# Altium PCB 智能家居-网关.PcbDoc
Units mm, origin at the board's own origin, x right, y up, seen from the top; angles counter-clockwise.
Board outline 69.01 x 59.12 mm, 2 copper layers (Top Layer, Bottom Layer); 32 components, 32 nets, 146 pads, 0 vias.
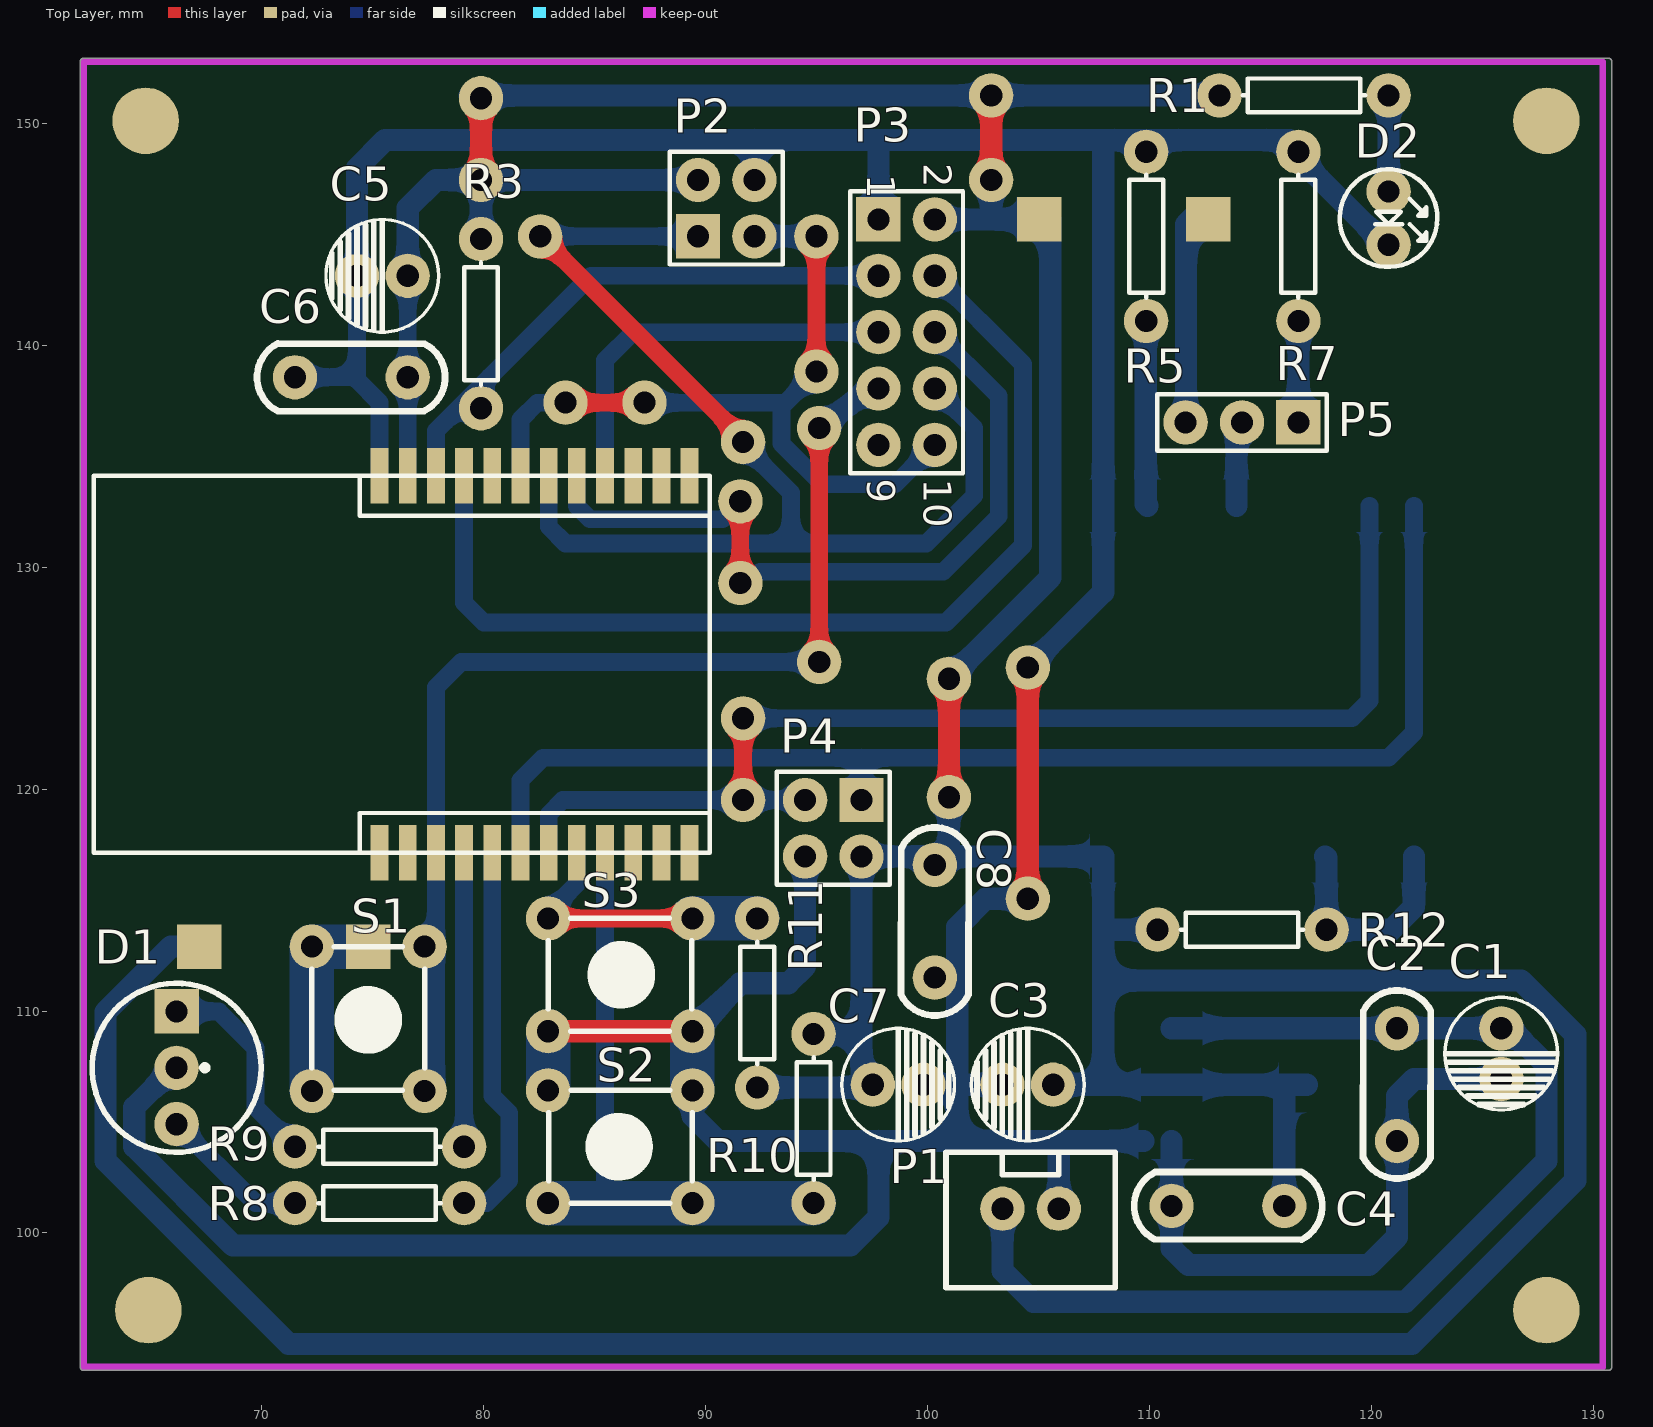
[diagram p0: Top Layer view]
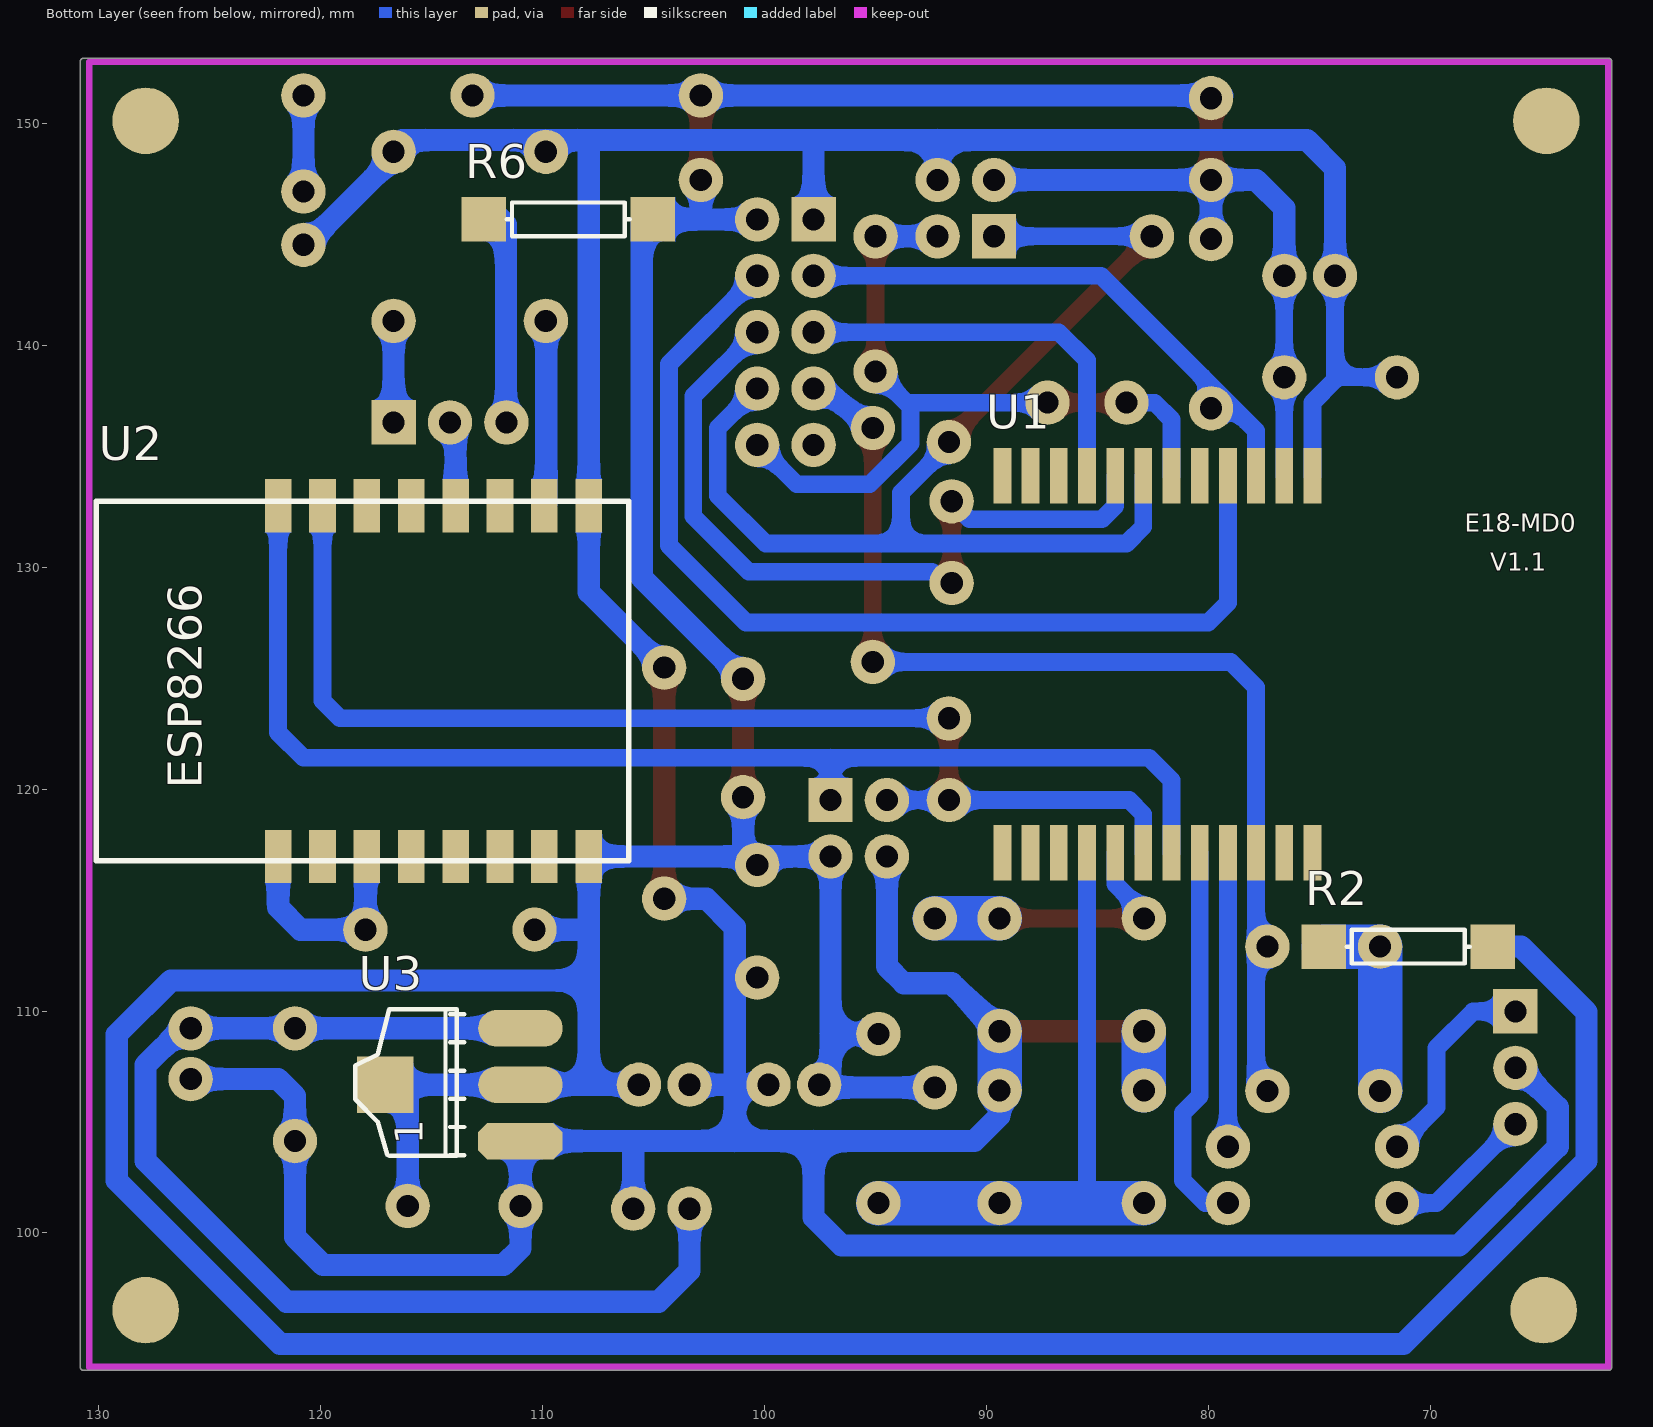
[diagram p1: Bottom Layer view, seen from below]

## Layer stack, top to bottom
Top Solder: solder mask 0.0102, Solder Resist, Dk 3.5
Top Layer: signal copper 0.0356
Dielectric 1: dielectric 0.32, FR-4, Dk 4.8
Bottom Layer: signal copper 0.0356
Bottom Solder: solder mask 0.0102, Solder Resist, Dk 3.5

## Board outline
61.976,93.807 cw(c61.976,93.957) 61.826,93.957 61.826,152.781 cw(c61.976,152.781) 61.976,152.931 130.683,152.931 cw(c130.683,152.781) 130.833,152.781 130.833,93.957 cw(c130.683,93.957) 130.683,93.807

## Design rules (kind name [scope] priority, off if disabled: settings)
Clearance [All] p1: gap=0.3
PolygonConnect [All] p1: connectstyle=Relief reliefconductorwidth=0.254 reliefentries=4 polygonreliefangle="90 Angle" airgapwidth=0.254
RoutingVias [All] p1: holewidth=1 width=2 viastyle="Through Hole" minholewidth=0.711 minwidth=1.27 maxholewidth=0.711 maxwidth=1.27
SolderMaskExpansion [All] p1: expansion=0.102
Width [All] p1: maxlimit=3 minlimit=0.5 preferedwidth=0.5 minimp=50.000000 maximp=50.000000 favimp=50.000000
30 further rules are at their usual default settings.

## Components (designator, comment, footprint, x,y, rotation, side; value= is the part's Value field where it differs from the comment)
C1 "Cap Pol1" CD5 125.857,109.22 r0 top
C2 "0.01uF" 0.1UF 121.158,106.68 r90 top
C3 "Cap Pol1" CD5 105.664,106.68 r270 top
C4 "0.01uF" 0.1UF 113.538,101.219 r0 top
C5 "Cap Pol1" CD5 76.581,143.129 r270 top
C6 "103" 0.1UF 74.041,138.557 r180 top
C7 "Cap Pol1" CD5 97.536,106.68 r90 top
C8 "103" 0.1UF 100.33,114.046 r270 top
D1 "RG-LED-K" RG-LED 66.167,109.982 r270 top
D2 "LED0" LED-3 120.777,146.926 r270 top
P1 "主控板电源接口" DG1282 108.458,110.236 r180 top
P2 "调试接口" HDR2X2 89.662,144.907 r0 top
P3 "程序下载接口" HDR2X5 97.79,145.669 r270 top
P4 "程序下载接口" HDR2X2 97.028,119.507 r180 top
P5 "ESP8266启动模式选择" HDR1X3 116.713,136.525 r180 top
R1 "Res1" AXIAL-0.3#1 116.967,151.257 r0 top
R2 "4.7K" AXIAL-0.3#2 70.993,112.903 r0 bottom
R3 "4.7K" AXIAL-0.3#1 79.883,140.97 r270 top
R5 "4.7K" AXIAL-0.3#1 109.855,144.907 r90 top
R6 "4.7K" AXIAL-0.3#2 108.839,145.669 r180 bottom
R7 "4.7K" AXIAL-0.3#1 116.713,144.907 r270 top
R8 "100" AXIAL-0.3#1 75.311,101.346 r0 top
R9 "100" AXIAL-0.3#1 75.311,103.886 r0 top
R10 "4.7K" AXIAL-0.3#1 94.869,105.156 r270 top
R11 "4.7K" AXIAL-0.3#1 92.329,110.363 r90 top
R12 "4.7K" AXIAL-0.3#1 114.173,113.665 r180 top
S1 "SW-PB" KEY_M 77.343,112.903 r270 top
S2 "SW-PB" KEY_M 89.408,101.346 r180 top
S3 "SW-PB" KEY_M 82.908,114.173 r0 top
U1 "Zigbee" E18-MD0-1 89.281,133.223 r180 bottom
U2 "ESP8266-12F" "ESP8266 - 12S" 121.919,116.967 r90 bottom
U3 "AMS1117-3.3" AMS1117 111,104.139 r90 bottom

## Footprints (in the part's own frame and the unit in brackets; to place one, negate y for a bottom-side part, rotate by r counter-clockwise, add the part's x,y. Pads: shape width x height; smd on the part's side, far side on the other; paste and mask are expansions set on the pad)
0.1UF [mm]
  round 2 hole 1: 1(-2.54,0) 2(2.54,0)
  silkscreen extent -4.22,-1.52 4.25,1.53
AMS1117 [mil]
  oct 65x150 smd: 1(0.03,-0.06)
  oval 65x150 smd: 2(100.03,-0.06) 3(200.03,-0.06)
  rect 100x100 smd: 4(100.03,239.94)
  silkscreen extent -26,100 234,293
AXIAL-0.3#1 [mm] "Axial Device, Thru-Hole; 2 Leads; 0.3 in Pin Spacing"
  round 2 hole 1: 1(-3.81,0) 2(3.81,0)
  silkscreen extent -2.77,-0.76 2.77,0.76
AXIAL-0.3#2 [mm] "Axial Device, Thru-Hole; 2 Leads; 0.3 in Pin Spacing"
  rect 2x2 all layers, no hole: 1(-3.81,0) 2(3.81,0)
  silkscreen extent -2.77,-0.76 2.77,0.76
CD5 [mm]
  round 2 hole 1: 1(0,0) 2(0,-2.286)
  silkscreen extent -2.54,-3.68 2.54,1.39
DG1282 [mm]
  round 2 hole 1: 1(2.54,9.144) 2(5.08,9.144)
  silkscreen extent 0,6.6 7.62,12.7
E18-MD0-1 [mm] "Connector; Header; 8 Position"
  rect 0.8x2.5 all layers, no hole: 1(13.97,0.9) 2(12.7,0.9) 3(11.43,0.9) 4(10.16,0.9) 5(8.89,0.9) 6(7.62,0.9) 7(6.35,0.9) 8(5.08,0.9) 9(3.81,0.9) 10(2.54,0.9) 11(1.27,0.9) 12(0,0.9) 13(0,-16.1) 14(1.27,-16.1) 15(2.54,-16.1) 16(3.81,-16.1) 17(5.08,-16.1) 18(6.35,-16.1) 19(7.62,-16.1) 20(8.89,-16.1) 21(10.16,-16.1) 22(11.43,-16.1) 23(12.7,-16.1) 24(13.97,-16.1)
  Top Layer lines w0.22: 0.14,-15.52 cw(c0.116,-15.496) 0.116,-15.53 0.11,-15.53
"ESP8266 - 12S" [mm]
  rect 2.4x1.2 smd: 1(0,0) 2(0,-2) 3(0,-4) 4(0,-6) 5(0,-8) 6(0,-10) 7(0,-12) 8(0,-14) 9(15.8,-14) 10(15.8,-12) 11(15.8,-10) 12(15.8,-8) 13(15.8,-6) 14(15.8,-4) 15(15.8,-2) 16(15.8,0)
  silkscreen extent -0.2,-15.8 16,8.2
HDR1X3 [mm] "Connector; Header; 3 Position"
  rect 2x2 hole 1: 1(0,0)
  round 2 hole 1: 2(2.54,0) 3(5.08,0)
  silkscreen extent -1.27,-1.27 6.35,1.27
HDR2X2 [mm]
  rect 2x2 hole 1: 1(0,0)
  round 2 hole 1: 2(0,2.54) 3(2.54,0) 4(2.54,2.54)
  silkscreen extent -1.27,-1.27 3.81,3.81
HDR2X5 [mm] "Connector; Header; 5x2 Position"
  rect 2x2 hole 1: 1(0,0)
  round 2 hole 1: 2(0,2.54) 3(2.54,0) 4(2.54,2.54) 5(5.08,0) 6(5.08,2.54) 7(7.62,0) 8(7.62,2.54) 9(10.16,0) 10(10.16,2.54)
  silkscreen extent -1.27,-1.27 11.43,3.81
KEY_M [mm]
  round 2 hole 1: 1(0,0) 1(6.5,0) 2(0,-5.08) 2(6.5,-5.08)
  silkscreen extent 0,-5.08 6.48,0
LED-3 [mm]
  round 2 hole 1: 1(0,0) 2(2.4,0)
  silkscreen extent -1,-2.2 3.4,2.2
RG-LED [mm]
  rect 2x2 hole 1: 1(0,0)
  round 2 hole 1: 2(2.54,0) 3(5.08,0)
  silkscreen extent -1.27,-3.81 6.35,3.81

## Part data
C1 C3 C5 C7: "Polarized Capacitor (Radial)"
C2 C4 C6 C8: library part C
D2: "Typical INFRARED GaAs LED"
P1: library part "Header 2H", "Header, 2-Pin, Right Angle"
P2 P4: library part "Header 2X2H", "Header, 2-Pin, Dual row, Right Angle"
P3: library part "Header 5X2", "Header, 5-Pin, Dual row"
P5: library part "Header 3", "Header, 3-Pin"
R1: "Resistor"
R2 R3 R5 R6 R7 R8 R9 R10 R11 R12: library part R
S1 S2 S3: "Switch"
U1: library part E18-MDO, "Zigbee模块"
U2: library part ESP8266_12S
U3: library part AMS1117

## Free pads (board coordinates)
  round 2 hole 1: 2(79.883,147.447) 2(79.883,151.13) 2(91.694,119.507) 2(100.965,119.634) 2(100.965,124.968) 2(102.87,147.447) 2(102.87,151.257) 3(91.694,123.19) 4(82.55,144.907) 4(83.693,137.414) 4(87.249,137.414) 4(91.567,129.286) 4(91.567,132.969) 4(91.694,135.636) 4(94.996,138.811) 4(94.996,144.907) 4(95.123,125.73) 4(95.123,136.271) 6(104.521,115.062) 7(104.521,125.476)
  round 3 all layers, no hole: 8(64.77,150.114) 8(64.897,96.52) 8(127.889,150.114) 9(127.889,96.52)

## Nets (pads, with @x,y where several pads share a name; then routed paths per layer and width w, separated by ;. In a path a pad name is that pad's centre, name@x,y a point inside that pad or via, vN(x,y) a via of type N, cw(c..) or ccw(c..) an arc to the next point about the centre after c; other vN are vias at no path point)
BOOT: P5.2 U2.12 | length 3.9
  Bottom Layer w1: U2.12 113.919,136.271 P5.2
DBG_CSN: P3.5 U1.9 | length 18
  Bottom Layer w0.8: U1.9 85.471,139.319 86.741,140.589 P3.5
DBG_DC: P3.3 R3.2 U1.3 | length 24.9
  Bottom Layer w0.8: U1.3 77.851,136.144 84.836,143.129 P3.3
DBG_DIO: P3.4 U1.4 | length 46.5
  Bottom Layer w0.8: U1.4 79.121,128.397 80.01,127.508 100.838,127.508 104.308,130.978 104.308,139.151 P3.4
DBG_MISO: P2.3 P3.10 pad.4@83.693,137.414 pad.4@87.249,137.414 pad.4@94.996,138.811 pad.4@94.996,144.907 U1.6 | length 35.7
  Top Layer w0.8: pad.4@83.693,137.414 pad.4@87.249,137.414 ; pad.4@94.996,138.811 pad.4@94.996,144.907
  Bottom Layer w0.8: U1.6 81.661,136.652 82.423,137.414 pad.4@83.693,137.414 ; pad.4@87.249,137.414 93.599,137.414 pad.4@94.996,138.811 ; 93.423,137.238 93.423,135.567 95.259,133.731 98.552,133.731 P3.10
  Bottom Layer w1: P2.3 pad.4@94.996,144.907
DBG_MOSI: P2.1 P3.8 pad.4@82.55,144.907 pad.4@91.694,135.636 U1.7 | length 53.9
  Top Layer w0.8: pad.4@82.55,144.907 91.694,135.763 pad.4@91.694,135.636
  Bottom Layer w0.8: pad.4@82.55,144.907 P2.1 ; U1.7 82.931,131.826 83.693,131.064 93.853,131.064 ; pad.4@91.694,135.636 91.694,135.509 93.853,133.35 93.853,131.064 ; P3.8 102.108,136.271 102.108,133.223 99.949,131.064 93.853,131.064
DBG_SCK: P3.6 pad.4@91.567,129.286 pad.4@91.567,132.969 U1.8 | length 34.3
  Top Layer w0.8: pad.4@91.567,129.286 pad.4@91.567,132.969
  Bottom Layer w0.8: U1.8 84.201,132.753 84.79,132.164 90.762,132.164 pad.4@91.567,132.969 ; 92.456,129.794 100.711,129.794 103.208,132.291 103.208,137.711 P3.6
GND: C1.2 C2.1 C3.2 C4.1 C5.2 C6.2 C7.2 C8.2 D1.2 D2.2 P1.1 P2.4 P3.1 P4.4 pad.6 pad.7 R5.2 R7.1 S2.2 S3.2 U1.1 U2.9 U3.1 | length 243.4
  Top Layer w1: S3.2@82.908,109.093 S3.2@89.408,109.093 ; pad.6 pad.7
  Bottom Layer w0.8: C6.2 74.295,138.557 ; C5.2 74.295,138.557 ; U1.1 75.311,137.423 74.295,138.439 74.295,138.557
  Bottom Layer w1: D1.2 66.04,107.442 64.262,105.664 64.262,103.886 68.707,99.441 96.52,99.441 97.79,100.711 97.79,104.14 ; C5.2 74.295,147.977 75.565,149.247 92.202,149.247 ; S2.2@89.408,106.426 89.408,105.283 90.551,104.14 97.79,104.14 ; S3.2@89.408,109.093 91.567,111.252 93.726,111.252 94.488,112.014 P4.4 ; P2.4 92.202,149.247 ; P3.1 97.79,149.12 97.917,149.247 ; C7.2 101.346,106.68 ; C3.2 101.473,106.68 ; pad.6 102.616,115.062 101.346,113.792 101.346,106.807 101.473,106.68 ; pad.7 107.919,128.874 U2.9 107.919,149.225 ; P1.1 105.918,103.886 106.172,104.14 ; U3.1@109.728,104.14 106.172,104.14 ; R5.2@109.728,148.717 R5.2@109.855,148.844 ; U3.1 C4.1 110.998,99.314 111.76,98.552 119.888,98.552 121.158,99.822 C2.1 121.158,106.172 121.92,106.934 C1.2 ; R7.1 116.713,148.444 120.631,144.526 D2.2 ; R7.1@116.713,148.844 116.31,149.247 97.917,149.247 ; 92.202,149.247 97.917,149.247 ; 97.79,104.14 101.346,104.14 ; 101.346,104.14 101.346,106.68 ; 101.346,104.14 106.172,104.14 ; 101.346,106.68 101.473,106.68
  Bottom Layer w2: S2.2@82.908,106.426 S3.2@82.908,109.093 ; S2.2@89.408,106.426 S3.2@89.408,109.093
GPIO15: R5.1 U2.10 | length 8.5
  Bottom Layer w1: R5.1@109.855,141.224 109.833,141.202 109.833,132.853 U2.10
KEY1: R11.2 S3.1 U1.17 | length 12.7
  Top Layer w0.8: S3.1@82.908,114.173 S3.1@89.408,114.173
  Bottom Layer w0.8: S3.1@82.908,114.427 84.201,115.72 U1.17
  Bottom Layer w2: S3.1@89.408,114.173 R11.2
KEY2: R10.2 S2.1 U1.16 | length 28.2
  Bottom Layer w0.8: 85.344,101.346 85.344,101.092 85.471,101.219 ; 85.471,100.965 85.471,101.219 ; 85.471,101.346 85.471,101.219 ; 85.471,101.6 U1.16
  Bottom Layer w2: S2.1@82.908,101.346 85.344,101.346 ; 85.471,101.346 89.408,101.346 R10.2
LED1: R9.2 U1.21 | length 13.2
  Bottom Layer w0.8: R9.2 U1.21
LED2: R8.2 U1.20 | length 17.5
  Bottom Layer w0.8: R8.2 80.137,101.346 81.153,102.362 81.153,105.41 80.391,106.172 U1.20
NetD1_1: D1.1 R9.1 | length 9.4
  Bottom Layer w0.8: D1.1 68.072,109.982 69.723,108.331 69.723,105.664 R9.1
NetD1_3: D1.3 R8.1 | length 6.8
  Bottom Layer w0.8: D1.3 69.723,101.346 R8.1
NetD2_1: D2.1 R1.2 | length 4.3
  Bottom Layer w1: D2.1 R1.2
NetP5_1: P5.1 R7.2 | length 4.7
  Bottom Layer w1: P5.1 R7.2 R7.2@116.713,141.224
NetP5_3: P5.3 R6.1 | length 10
  Bottom Layer w1: P5.3 111.655,136.547 111.655,145.437 R6.1@112.395,146.177
NetR2_2: R2.2 S1.2 | length 9
  Bottom Layer w2: S1.2@72.263,106.403 72.263,112.903 R2.2
NetR12_1: R12.1 U2.1 U2.3 | length 10
  Bottom Layer w1: U2.3 117.983,116.903 R12.1 120.904,113.665 121.919,114.68 U2.1
P0.2: P4.1 U1.19 U2.16 | length 56.5
  Bottom Layer w0.8: U1.19 81.661,120.396 82.677,121.412 97.028,121.412 ; P4.1 97.028,121.412 ; U2.16 121.919,122.554 120.777,121.412 97.028,121.412
P0.3: P4.3 pad.2@91.694,119.507 pad.3 U1.18 U2.15 | length 54.6
  Top Layer w0.8: pad.2@91.694,119.507 pad.3
  Bottom Layer w0.8: U1.18 82.931,118.872 83.566,119.507 91.694,119.507 P4.3 ; pad.3 119.126,123.19 119.919,123.983 U2.15
P0.6: U1.15
P0.7: U1.14
P1.0: U1.13
P1.1: U1.12
P1.2: U1.11
P1.3: U1.10
P2.0: U1.5
RST: P3.7 pad.4@95.123,125.73 pad.4@95.123,136.271 S1.1 U1.22 | length 50.1
  Top Layer w0.8: pad.4@95.123,125.73 pad.4@95.123,136.271
  Bottom Layer w0.8: S1.1@77.089,106.403 77.851,107.165 U1.22 77.851,124.587 78.994,125.73 pad.4@95.123,125.73
  Bottom Layer w1: pad.4@95.123,136.271 97.409,138.049 P3.7
VCC-3.3: C3.1 C4.2 C5.1 C6.1 C7.1 C8.1 P2.2 P3.2 P4.2 pad.2@79.883,147.447 pad.2@79.883,151.13 pad.2@100.965,119.634 pad.2@100.965,124.968 pad.2@102.87,147.447 pad.2@102.87,151.257 R1.1 R2.1 R3.1 R6.2 R10.1 R11.1 R12.2 U1.2 U2.8 U3.2 U3.4 | length 279.1
  Top Layer w1: pad.2@79.883,147.447 pad.2@79.883,151.13 ; pad.2@100.965,119.634 pad.2@100.965,124.968 ; pad.2@102.87,147.447 pad.2@102.87,151.257
  Bottom Layer w0.8: C6.1@76.073,138.557 76.581,138.049 U1.2 ; C6.1 C5.1
  Bottom Layer w1: R2.1 65.913,112.903 62.962,109.952 62.962,103.251 71.217,94.996 121.823,94.996 129.189,102.362 129.189,108.936 126.746,111.379 107.919,111.379 ; C5.1 76.581,146.177 77.851,147.447 pad.2@79.883,147.447 ; pad.2@79.375,151.257 102.87,151.257 R1.1 ; R3.1 pad.2@79.883,147.447 ; P2.2 pad.2@79.883,147.447 ; R11.1 C7.1@97.028,106.553 ; R10.1 97.028,108.966 ; C7.1@97.79,106.68 97.663,106.553 C7.1@97.028,106.553 ; P3.2 102.997,145.669 ; pad.2@100.965,119.634 C8.1@100.965,116.967 ; pad.2@100.965,124.968 105.537,129.54 105.537,145.669 R6.2 102.997,145.669 ; pad.2@102.87,147.447 102.87,145.796 102.997,145.669 ; C3.1 107.919,106.68 ; 108.204,113.665 R12.2 ; C4.2 U3.4@116.078,106.299 ; U3.4 U3.2 107.919,106.68 ; C7.1@97.028,106.553 97.028,108.966 ; 97.028,108.966 P4.2 C8.1@100.965,116.967 ; C8.1@100.965,116.967 U2.8 107.919,111.379 ; 107.919,106.68 107.919,111.379
VCC-5: C1.1 C2.2 P1.2 U3.3 | length 52.4
  Bottom Layer w1: P1.2 103.378,98.298 104.775,96.901 121.539,96.901 127.889,103.251 127.889,107.569 126.238,109.22 C1.1 C2.2 U3.3
pads on no net: P3.9 U1.23 U1.24 U2.2 U2.4 U2.5 U2.6 U2.7 U2.11 U2.13 U2.14

## Keep-outs
Keep-Out Layer:
  lines w0.3: 61.976,93.957 61.976,152.781 130.429,152.781 130.429,93.957 61.976,93.957

## Silkscreen, mask and mechanical layers (free items; w line width, h text height)
Drill Drawing:
  text ".LEGEND" at 175.88,81.28 h1.52
  text "Drill Drawing." at 175.88,78.74 h1.52

## Dimensions
61.976,93.957 to 61.976,152.781 on Mechanical 1
61.976,93.957 to 130.429,93.957 on Mechanical 1

## Text inside footprints (layer, text, board x,y; h text height)
P3: Top Overlay "10" at 99.822,133.985 h1.27 r270; Top Overlay "9" at 97.282,133.985 h1.27 r270; Top Overlay "1" at 97.282,147.701 h1.27 r270; Top Overlay "2" at 99.822,148.209 h1.27 r270
U1: Bottom Overlay "E18-MD0" at 68.441,131.603 h0.8; Bottom Overlay "V1.1" at 67.311,129.833 h0.8
U2: Bottom Overlay "ESP8266" at 125.348,120.015 h1.52 r270
U3: Bottom Overlay "1" at 115.392,103.988 h1.27 r270